# EAGLE board sam (EAGLE 7.5.0)
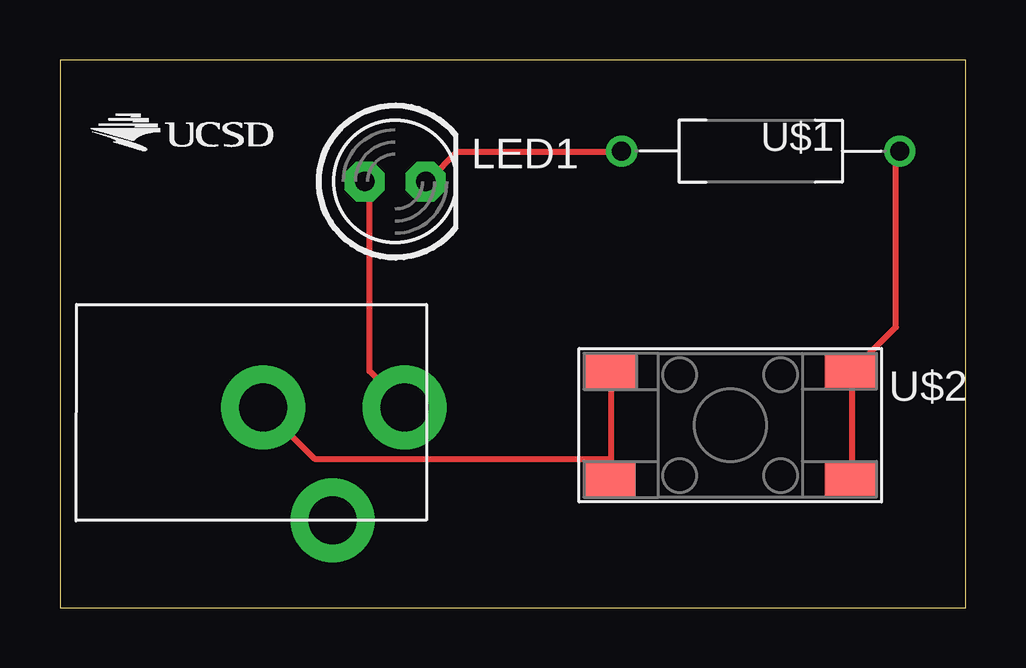
[diagram p0: board, top side]

Size 37.77 x 22.85 mm. Coordinates in mm from the lower left corner, seen from the top.
Outline: 0,0 37.77,0 37.77,22.85 0,22.85 0,0
Copper layers (1*16): Top 0.035559375mm / dielectric 1.501140625mm / Bottom 0.035559375mm
Design rules "4pcb-33board": minimum track width 6mil, minimum drill 15mil, track to track 6mil, track to pad 6mil, pad to pad 6mil, via to via 6mil, smd to smd 6mil, copper to edge 10mil, drill to drill 10mil, minimum pad ring 10mil, minimum via ring 8mil, stop-mask expansion 4mil, vias tented up to drill 0mil, thermal gap 10mil

## Footprints (pad centres in the part's own frame; a part is rotated, then mirrored left to right if it is on the bottom)
PJ-102A = drill 2 pad 3.5: RING -6.77,-4.345; RING_SW -3.87,-9.045; TIP -0.87,-4.345
LED5MM = drill 0.813 pad 1.676 octagon: A -1.27,0; K 1.27,0
RESAD1160W55L680D260_HS = drill 0.8 pad 1.2: 1 -5.8,0; 2 5.8,0
BUTTON-TACTILE-SQUARE = smd 2.1 x 1.4: P$1 -5,2.25; P$2 5,2.25; P$3 -5,-2.25; P$4 5,-2.25

## Placement (x,y rotation side)
J1  2.1MMJACKTHM  [PJ-102A]  15.24,12.7 0 top
LED1  Red  [LED5MM]  13.97,17.78 0 top
U$1  330Ohms  [RESAD1160W55L680D260_HS]  29.21,19.05 0 top
U$2  [BUTTON-TACTILE-SQUARE]  27.94,7.62 0 top
U$3  [UCSD_LOGO]  1.27,19.05 0 top

## Library data of the parts
J1 LED1 U$1 = Lab2
U$2 = yuhan_Lab2
U$3 = ucsd_logo

## Nets
N$1: LED1.K U$1.1
N$2: U$1.2 U$2.P$2 U$2.P$4
N$3: J1.TIP LED1.A
N$5: J1.RING U$2.P$1 U$2.P$3

## Tracks (layer width: path | path; a pad name or v marks a point on that pad's centre or on a via)
N$1
  Top 0.254: U$1.1 23.19,19.02 16.56,19.02 15.42,17.88 LED1.K
N$2
  Top 0.254: U$2.P$4 33.02,5.54 33.02,9.65 U$2.P$2 33.02,9.88 34.85,11.71 34.85,19.02 U$1.2
N$3
  Top 0.254: LED1.A 12.9,17.65 12.9,9.88 14.28,8.51 J1.TIP
N$5
  Top 0.254: 22.96,6.22 22.96,9.65 U$2.P$1 | 22.96,6.22 22.96,5.54 U$2.P$3 | 22.96,6.22 10.62,6.22 8.56,8.28 J1.RING